# Allegro board netduino_plus2_20Dec16.brd
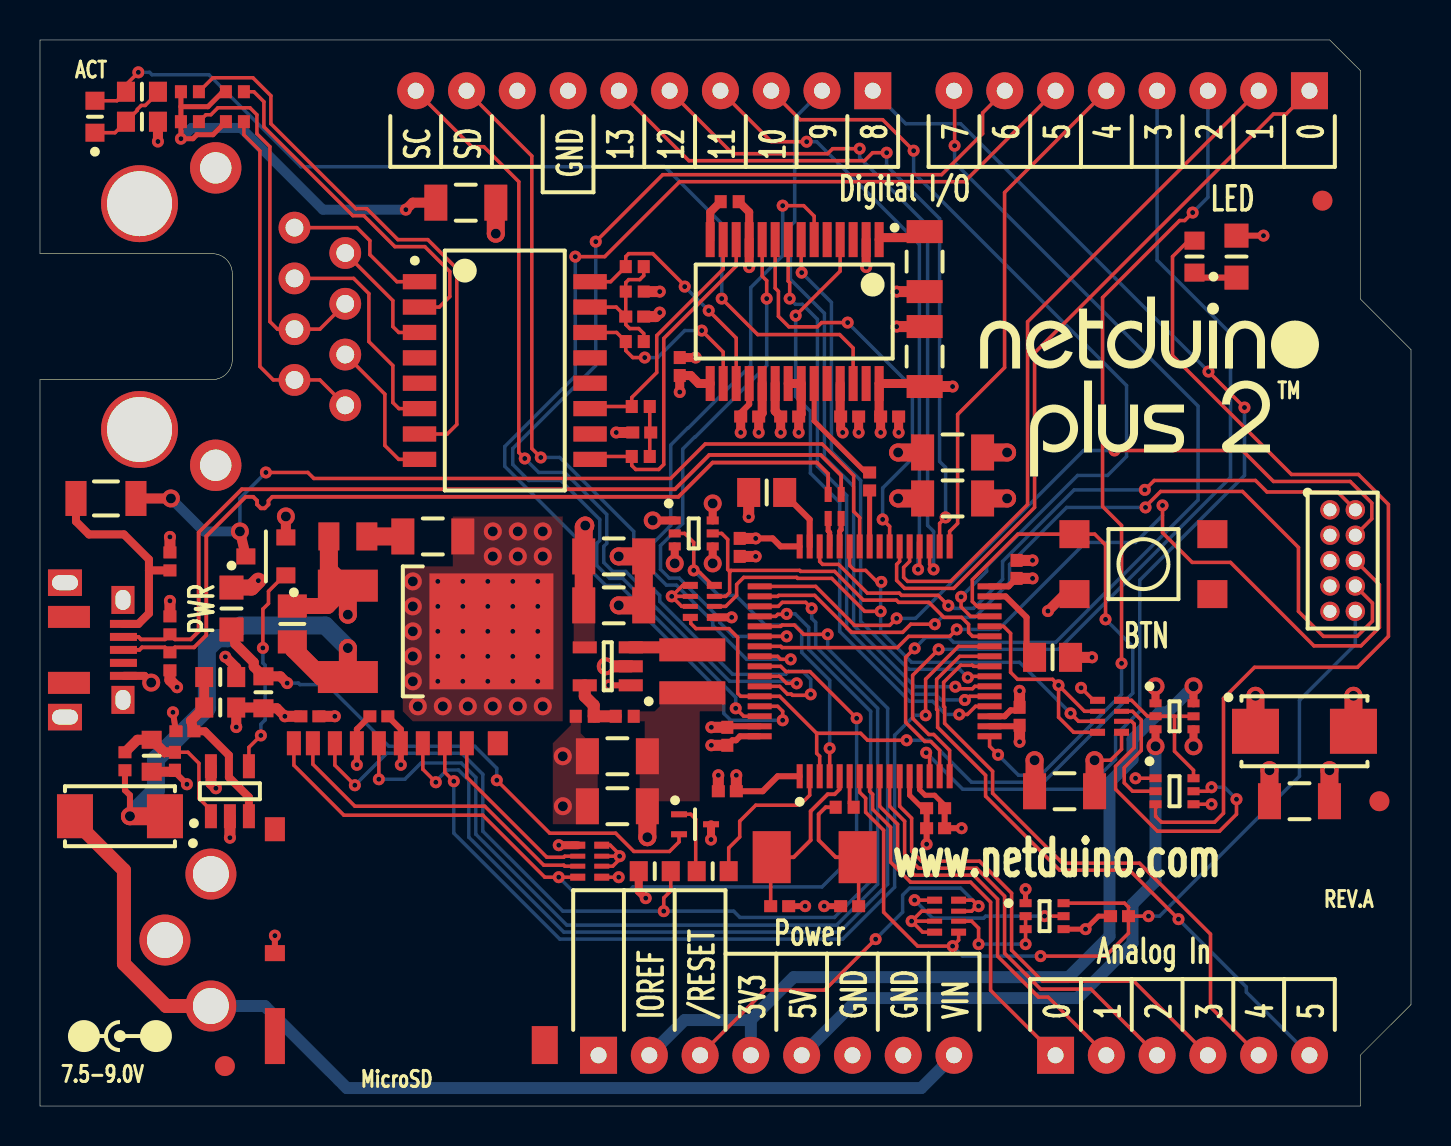
[diagram p0: board, top side]
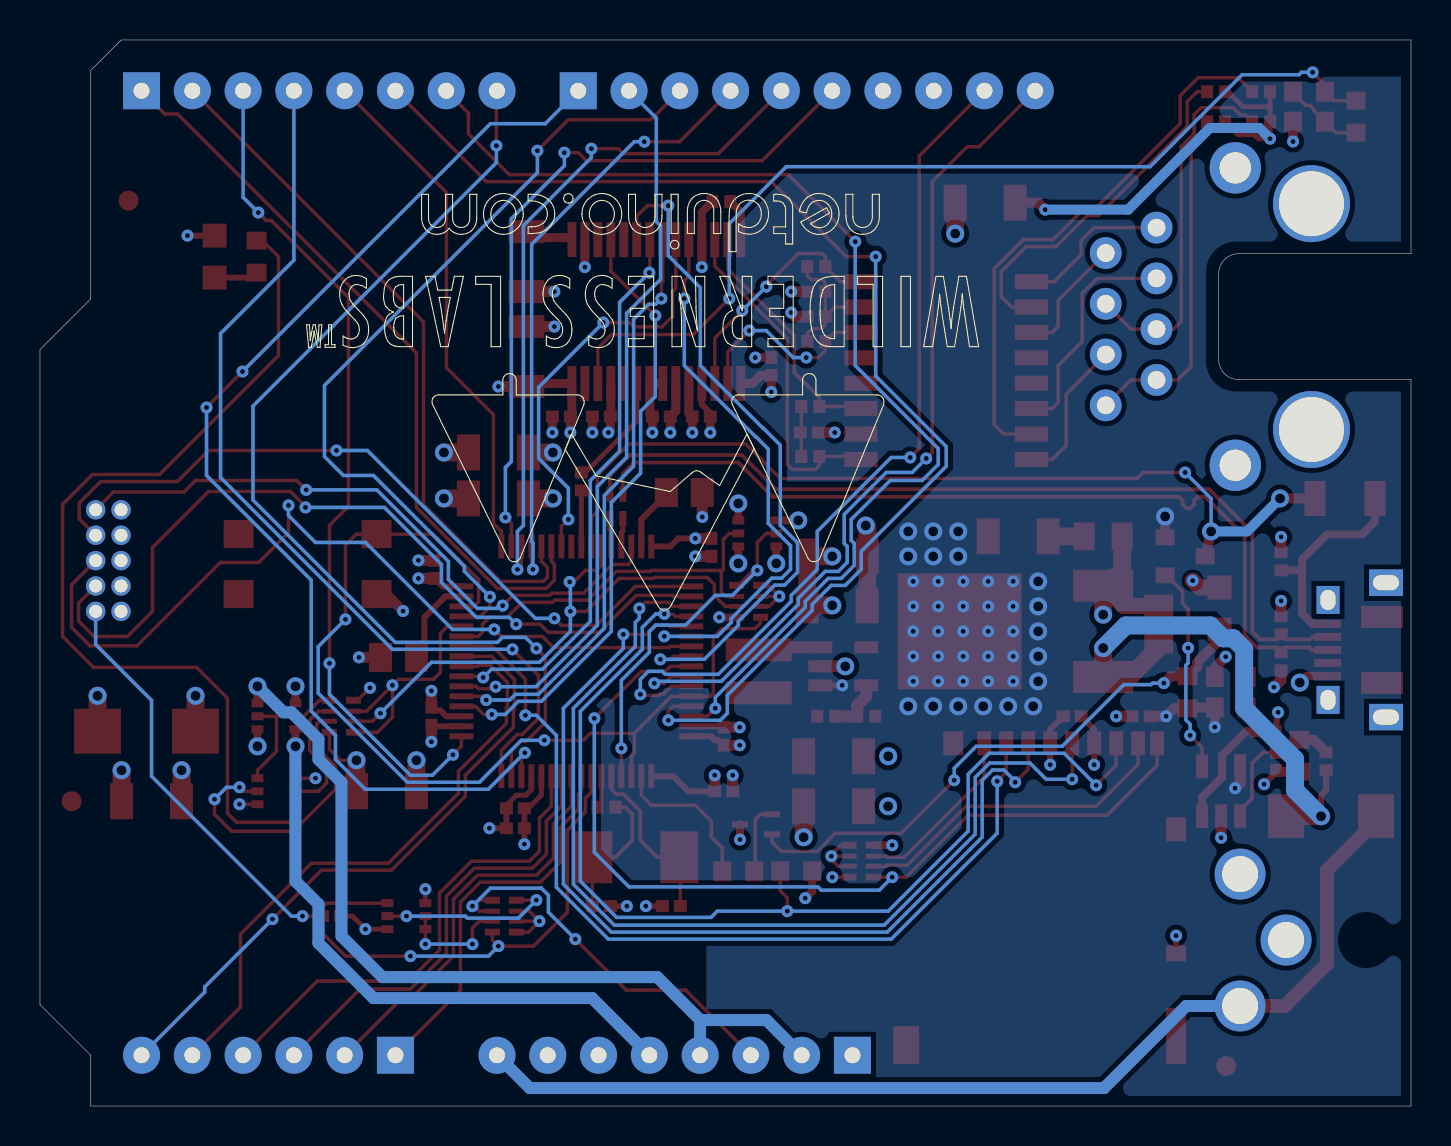
[diagram p1: board, bottom side, seen from below]

Outline 68.58 x 53.34 mm; copper layers: TOP, L2-GND, L3-PWR, BOTTOM. Coordinates in mm from the lower left corner of the outline.
Outline path: 0,53.34 0,42.65 8.62,42.65 arc(9.33,42.35) 9.62,41.65 9.62,37.35 arc(9.33,36.64) 8.62,36.35 0,36.35 0,0 66.04,0 66.04,2.54 68.58,5.08 68.58,37.85 66.04,40.39 66.04,51.82 64.52,53.34 0,53.34

## Placement (name value [footprint] x y rotation side)
C1  0.47uF  [CAPC2012X125N]  12.62 24.12 90 top
C2  10uF  [CAPC3216X180N]  19.65 28.5 180 top
C3  0.1uF  [CAPC1005X55N]  7.25 18.75 180 top
C4  0.1uF  [CAPC1005X55N]  13.5 19.5 0 top
C5  10uF  [CAPC3216X180N]  28.7 25.05 0 top
C6  10uF  [CAPC3216X180N]  28.7 27.5 0 top
C7  10uF  [CAPC3216X180N]  28.88 17.5 180 top
C8  10uF  [CAPC3216X180N]  28.88 15 180 top
C9  0.1uF  [CAPC1005X55N]  6.75 17.25 270 top
C10  0.1uF  [CAPC1005X55N]  34.38 15.75 180 top
C11  0.1uF  [CAPC1005X55N]  49 19.5 270 top
C12  0.1uF  [CAPC1005X55N]  48.85 26.85 90 top
C13  0.1uF  [CAPC1005X55N]  35 27.95 270 top
C14  0.1uF  [CAPC1005X55N]  34.38 18.5 90 top
C15  10uF  [CAPC3216X180N]  51.25 15.75 0 top
C16  10uF  [CAPC3216X180N]  45.65 32.7 0 top
C17  10uF  [CAPC3216X180N]  45.65 30.4 0 top
C18  2.2uF  [CAPC2012X125N]  36.35 30.7 180 top
C19  2.2uF  [CAPC2012X125N]  50.65 22.45 0 top
C20  0.1uF  [CAPC1005X55N]  44.8 14.9 180 top
C21  1uF  [CAPC1005X55N]  44.8 13.9 180 top
C22  0.1uF  [CAPC1005X55N]  54 9.5 180 top
C23  18pF  [CAPC1005X55N]  37 10 0 top
C24  18pF  [CAPC1005X55N]  40.5 10 180 top
C25  100uF  [CAPMP6032X280N]  63.25 18.75 0 top
C26  10uF  [CAPC3216X180N]  63 15.25 0 top
C27  10uF  [CAPC3216X180N]  44.25 37.5 90 top
C28  0.1uF  [CAPC1005X55N]  42.5 34.5 0 top
C29  0.1uF  [CAPC1005X55N]  40.5 34.5 0 top
C30  0.1uF  [CAPC1005X55N]  37.5 34.5 0 top
C31  0.1uF  [CAPC1005X55N]  35.5 34.5 180 top
C32  0.1uF  [CAPC1005X55N]  32 37 90 top
C33  0.1uF  [CAPC1005X55N]  16.95 19.5 180 top
C34  10uF  [CAPC3216X180N]  44.25 42.25 270 top
C35  0.1uF  [CAPC1005X55N]  30.1 33.7 180 top
C36  0.1uF  [CAPC1005X55N]  29.75 39.5 0 top
C37  1nF  [CAPC3216X180N]  21.3 45.2 0 top
D1  -  [SS15-TP]  4 14.5 180 top
D2  WHITE  [LEDC2012X110N]  9.58 24.89 270 top
D3  BLUE  [LEDC2012X110N]  59.85 42.5 90 top
D4  PGB1010402KR  [RESC1005X40AN]  6.5 27.25 90 top
D5  PGB1010402KR  [RESC1005X40AN]  6.5 24.05 90 top
D6  PGB1010402KR  [RESC1005X40AN]  6.5 22.25 270 top
D7  GREEN  [LEDC1608X80N]  2.75 49.5 90 top
F1  1206L050YR  [RESC3216X100N]  3.3 30.4 0 top
J1  HEADER 3  [ADC-043A-1]  8.55 8.31 90 top
J2  HDR100IMP08F-G-V-TH-BLUE  [HDR100IMP08F-G-V-TH]  63.5 50.8 180 top
J3  -  [DX4R005JJ2R1800]  0 22.82 270 top
J4  HDR100IMP08F-G-V-TH-BLUE  [HDR100IMP10F-G-V-TH]  41.66 50.8 180 top
J5  HDR100IMP08F-G-V-TH-BLUE  [HDR100IMP06F-G-V-TH]  50.8 2.54 0 top
J6  HDR100IMP08F-G-V-TH-BLUE  [HDR100IMP08F-G-V-TH]  27.94 2.54 0 top
J7  MINI_JTAG_SMD  [MINI_JTAG_TH]  65.16 27.29 0 top
J8  -  [DM3AT-SF-PEJ]  21.35 17.55 0 top
J9  44661-0002  [44661-0001]  0 39.5 270 top
L1  2.2uH  [LQH3NPN2R2NM0L]  32.63 21.75 270 top
L2  BEAD  [INDC1005X55N]  29.75 40.75 180 top
MT1  -  [MTG320H720NP]  15.24 50.8 0 top
MT2  -  [MTG320H720NP]  66.04 35.56 0 top
MT3  -  [MTG320H720NP]  66.04 7.62 0 top
NOREF  -  [unnamed]  67 15.25 0 top
NOREF#2  -  [unnamed]  64.15 45.3 0 top
NOREF#3  -  [#2]  4 3.5 0 top
NOREF#4  -  [unnamed]  9.25 2 0 top
NOREF#5  -  [#2]  0 53.34 0 top
NOREF#6  -  [#2]  47.02 36.9 0 top
NOREF#7  -  [#2]  0 0 90 top
Q1  MMBT3906TT1G  [SOT50P160X90-3N]  32.77 14.1 0 top
Q2  -  [MBT3904DW1T1G]  50.25 9.5 0 top
Q3  -  [MBT3904DW1T1G]  56.75 15.75 0 top
Q4  -  [NTR4101PT1G]  11.3 27.5 180 top
Q5  -  [NTJD4152PT1G]  56.75 19.5 0 top
Q6  -  [NTJD4152PT1G]  32.7 28.65 0 top
R2  1.5K  [RESC1608]  11.18 20.7 90 top
R3  1K  [RESC2012X70N]  15.4 28.5 0 top
R4  10K  [RESCAV50P80X160X60-8N]  45.35 9.5 0 top
R5  10k  [RESC1608]  33.65 11.75 180 top
R6  1K  [RESC1608]  57.75 42.5 90 top
R7  10K  [RESCAV50P80X160X60-8N]  27.5 12.25 180 top
R8  14K  [RESC1005X40AN]  4.25 17.25 90 top
R9  162K  [RESC1005X40AN]  29.25 19.5 180 top
R10  36K  [RESC1005X40AN]  27.25 19.5 180 top
R11  10K  [RESCAV50P80X160X60-8N]  53.5 19.5 0 top
R12  10K  [RESCAV50P80X160X60-8N]  33.13 25.25 0 top
R13  390  [RESC1005X40AN]  40.25 14.95 0 top
R14  22  [EXB24V]  39.75 30 270 top
R15  10k  [RESC1608]  5.1 50.75 0 top
R16  1.5K  [RESC1608]  5.1 49.25 0 top
R17  2.32k  [RESC1005X40AN]  34.5 45.25 0 top
R18  49.9  [RESC1005X40AN]  30.05 35 0 top
R19  49.9  [RESC1005X40AN]  30.05 32.5 0 top
R20  49.9  [RESC1005X40AN]  29.75 42 0 top
R21  49.9  [RESC1005X40AN]  29.75 38.25 0 top
R22  75  [RESC1005X40AN]  7.5 50.75 180 top
R23  75  [RESC1005X40AN]  9.75 50.75 180 top
R24  75  [RESC1005X40AN]  7.5 49.25 180 top
R25  75  [RESC1005X40AN]  9.75 49.25 180 top
R26  10k  [RESC1608]  30.75 11.75 180 top
R27  10k  [RESC1608]  9.02 21.46 0 top
R28  10k  [RESC1608]  5.59 17.53 270 top
R30  33  [RESC1005X40AN]  41.5 31.25 270 top
R31  10k  [RESC1608]  9.02 19.94 180 top
SW1  -  [TSXH-2GL]  55.2 27.11 180 top
T1  -  [HX1198NL]  23.25 36.8 0 top
U1  MC33269DT-5.0G  [MC33269DT]  15.4 23.75 0 top
U2  -  [ST1S12GR]  28.4 22 180 top
U3  LMV7271MF/NOPB  [SOT95P280X145-5N]  9.5 15.75 90 top
U4  STM32F205RFT6  [STM32F405RGT6]  41.75 22.25 90 top
U5  ENC28J60T-I/SS  [SOP65P780X200-28N]  38.4 39.75 270 top
Y1  25000Mhz  [ABM7]  38.75 12.45 180 top

## Library data of the parts
C1-C37 = C
D1 = D05AZ75_2
D2 D7 = LED_2
D3 = LED_1
D4-D6 = D05AZ75_1
F1 = FUSE
J1 = HEADER 3
J2 J6 = HEADER 8
J3 = HEADER 11_0
J4 = HEADER 10
J5 = HEADER 6
J7 = HEADER 10_2
J8 = HEADER 10_4
J9 = CONN_FPC10P_0
L1 = L
L2 = BEAD FERRITE/SM
MT1-MT3 = MOUNT_HOLE
Q1 = 2N1132_0
Q2 Q3 = MUN5215DW1T1G_6
Q4 = NDF0610/TO_1
Q5 Q6 = NTJD4152PT1G
R2 R3 R5 R6 R8-R10 R13 R15-R28 R30 R31 = R
R4 R7 R11 R12 = RESCAV50P80X160X60-8N
R14 = EXB24V
SW1 = SW PUSHBUTTON-SPST-2_0
T1 = HX1198NLT_0
U1 = LM7805/TO_2
U2 = HEADER 5_2
U3 = LMV321/SO
U4 = STM32F427_2
U5 = ENC28J60T-I/SS
Y1 = CRYSTAL_2

## Footprints (pads in the part's own frame, mm; a bottom-side part is the same pattern mirrored in y, then rotated)
44661-0001
  round 1.59 hole 0.89: 1(-4.45,12.73) 2(-3.18,15.27) 3(-1.91,12.73) 4(-0.64,15.27) 5(0.63,12.73) 6(1.9,15.27) 7(3.17,12.73) 8(4.44,15.27)
  round 2.57 hole 1.57: 9(-7.44,8.79) 10(7.44,8.79)
  round 3.85 hole 3.25: 11(-5.65,4.98) 12(5.65,4.98)
ABM7
  rect 1.9x2.6 smd: 1(-2.15,0) 2(2.15,0)
ADC-043A-1
  round 0 hole 2.4 unplated: (0,6.3)
  round 2.55 hole 1.8: 1(-3.3,0) 2(0,2.3) 3(3.3,0)
CAPC1005X55N
  rect 0.65x0.6 smd: 1(-0.45,0) 2(0.45,0)
CAPC2012X125N
  rect 1.15x1.45 smd: 1(-0.9,0) 2(0.9,0)
CAPC3216X180N
  rect 1.15x1.8 smd: 1(-1.5,0) 2(1.5,0)
CAPMP6032X280N
  rect 2.35x2.25 smd: 1(-2.45,0) 2(2.45,0)
DM3AT-SF-PEJ
  rect 0.7x1.2 smd: 1(0,0.6) 2(-1.1,0.6) 3(-2.2,0.6) 4(-3.3,0.6) 5(-4.4,0.6) 6(-5.5,0.6) 7(-6.6,0.6) 8(-7.7,0.6) 9(-8.65,0.6)
  rect 1x0.8 smd: 10(-9.6,-9.9)
  rect 1x1.2 smd: 11(-9.6,-3.7) 14(1.55,0.6)
  rect 1x2.8 smd: 12(-9.6,-14.05)
  rect 1.3x1.9 smd: 13(3.9,-14.5)
DX4R005JJ2R1800
  rect 0.4x1.35 smd: 1(-1.3,4.175) 2(-0.65,4.175) 3(0,4.175) 4(0.65,4.175) 5(1.3,4.175)
  rect 1.4x1.15 hole 1x0.75: 6(-2.5,4.15) 7(2.5,4.15)
  rect 1.325x1.7 hole 0.75x1.3: 8(-3.362,1.25) 11(3.362,1.25)
  rect 1.1x2.1 smd: 9(-1.65,1.45) 10(1.65,1.45)
EXB24V
  rect 0.75x0.35 smd: 1(-0.6,0.325) 2(-0.6,-0.325) 3(0.6,-0.325) 4(0.6,0.325)
HDR100IMP06F-G-V-TH
  rect 1.85x1.85 hole 0.8: 1(0,0)
  round 1.85 hole 0.8: 2(2.54,0) 3(5.08,0) 4(7.62,0) 5(10.16,0) 6(12.7,0)
HDR100IMP08F-G-V-TH
  rect 1.85x1.85 hole 0.8: 1(0,0)
  round 1.85 hole 0.8: 2(2.54,0) 3(5.08,0) 4(7.62,0) 5(10.16,0) 6(12.7,0) 7(15.24,0) 8(17.78,0)
HDR100IMP10F-G-V-TH
  rect 1.85x1.85 hole 0.8: 1(0,0)
  round 1.85 hole 0.8: 2(2.54,0) 3(5.08,0) 4(7.62,0) 5(10.16,0) 6(12.7,0) 7(15.24,0) 8(17.78,0) 9(20.32,0) 10(22.86,0)
HX1198NL
  rect 1.67x0.76 smd: 1(-4.265,4.445) 2(-4.265,3.175) 3(-4.265,1.905) 4(-4.265,0.635) 5(-4.265,-0.635) 6(-4.265,-1.905) 7(-4.265,-3.175) 8(-4.265,-4.445) 9(4.265,-4.445) 10(4.265,-3.175) 11(4.265,-1.905) 12(4.265,-0.635) 13(4.265,0.635) 14(4.265,1.905) 15(4.265,3.175) 16(4.265,4.445)
INDC1005X55N
  rect 0.6x0.6 smd: 1(-0.45,0) 2(0.45,0)
LEDC1608X80N
  rect 0.899x0.95 smd: A(0.8,0) C(-0.8,0)
LEDC2012X110N
  rect 1.2x1.2 smd: A(1.05,0) C(-1.05,0)
LQH3NPN2R2NM0L
  rect 1.15x3.3 smd: 1(-1.075,0) 2(1.075,0)
MBT3904DW1T1G
  rect 0.6x0.4 smd: 1(-0.95,0.65) 2(-0.95,0) 3(-0.95,-0.65) 4(0.95,-0.65) 5(0.95,0) 6(0.95,0.65)
MC33269DT
  rect 3x1.6 smd: 1(0,2.286) 3(0,-2.286)
  rect 6.2x5.8 smd: 4(7.18,0)
MINI_JTAG_TH
  round 0.97 hole 0.65: 1(-0.635,2.54) 2(0.635,2.54) 3(-0.635,1.27) 4(0.635,1.27) 5(-0.635,0) 6(0.635,0) 7(-0.635,-1.27) 8(0.635,-1.27) 9(-0.635,-2.54) 10(0.635,-2.54)
MTG320H720NP
  round 0 hole 3.2 unplated: (0,0)
NTJD4152PT1G
  rect 0.6x0.4 smd: 1(-0.95,0.65) 2(-0.95,0) 3(-0.95,-0.65) 4(0.95,-0.65) 5(0.95,0) 6(0.95,0.65)
NTR4101PT1G
  rect 0.95x0.8 smd: 1(-1,0.95) 2(-1,-0.95) 3(1,0)
RESC1005X40AN
  rect 0.6x0.65 smd: 1(-0.45,0) 2(0.45,0)
RESC1608
  rect 0.899x1.001 smd: 1(-0.8,0) 2(0.8,0)
RESC2012X70N
  rect 1.05x1.4 smd: 1(-0.95,0) 2(0.95,0)
RESC3216X100N
  rect 1.05x1.75 smd: 1(-1.5,0) 2(1.5,0)
RESCAV50P80X160X60-8N
  rect 0.75x0.35 smd: 1(-0.6,0.8) 4(-0.6,-0.8) 5(0.6,-0.8) 8(0.6,0.8)
  rect 0.75x0.25 smd: 2(-0.6,0.25) 3(-0.6,-0.25) 6(0.6,-0.25) 7(0.6,0.25)
SOP65P780X200-28N
  rect 1.75x0.45 smd: 1(-3.6,3.575) 2(-3.6,2.925) 3(-3.6,2.275) 4(-3.6,1.625) 5(-3.6,0.975) 6(-3.6,0.325) 7(-3.6,-0.325) 8(-3.6,-0.975) 9(-3.6,-1.625) 10(-3.6,-2.275) 11(-3.6,-2.925) 12(-3.6,-3.575) 13(-3.6,-4.225) 14(-3.6,-4.875) 15(3.6,-4.875) 16(3.6,-4.225) 17(3.6,-3.575) 18(3.6,-2.925) 19(3.6,-2.275) 20(3.6,-1.625) 21(3.6,-0.975) 22(3.6,-0.325) 23(3.6,0.325) 24(3.6,0.975) 25(3.6,1.625) 26(3.6,2.275) 27(3.6,2.925) 28(3.6,3.575)
SOT50P160X90-3N
  rect 0.8x0.3 smd: 1(-0.8,0.5) 2(-0.8,-0.5) 3(0.8,0)
SOT95P280X145-5N
  rect 1.2x0.6 smd: 1(-1.25,0.95) 2(-1.25,0) 3(-1.25,-0.95) 4(1.25,-0.95) 5(1.25,0.95)
SS15-TP
  rect 1.8x2.2 smd: A(2.25,0) C(-2.25,0)
ST1S12GR
  rect 1.2x0.6 smd: 1(-1.15,0.95) 2(-1.15,0) 3(-1.15,-0.95) 4(1.15,-0.95) 5(1.15,0.95)
STM32F405RGT6
  rect 1.2x0.3 smd: 1(-5.75,3.75) 2(-5.75,3.25) 3(-5.75,2.75) 4(-5.75,2.25) 5(-5.75,1.75) 6(-5.75,1.25) 7(-5.75,0.75) 8(-5.75,0.25) 9(-5.75,-0.25) 10(-5.75,-0.75) 11(-5.75,-1.25) 12(-5.75,-1.75) 13(-5.75,-2.25) 14(-5.75,-2.75) 15(-5.75,-3.25) 16(-5.75,-3.75) 33(5.75,-3.75) 34(5.75,-3.25) 35(5.75,-2.75) 36(5.75,-2.25) 37(5.75,-1.75) 38(5.75,-1.25) 39(5.75,-0.75) 40(5.75,-0.25) 41(5.75,0.25) 42(5.75,0.75) 43(5.75,1.25) 44(5.75,1.75) 45(5.75,2.25) 46(5.75,2.75) 47(5.75,3.25) 48(5.75,3.75)
  rect 0.3x1.2 smd: 17(-3.75,-5.75) 18(-3.25,-5.75) 19(-2.75,-5.75) 20(-2.25,-5.75) 21(-1.75,-5.75) 22(-1.25,-5.75) 23(-0.75,-5.75) 24(-0.25,-5.75) 25(0.25,-5.75) 26(0.75,-5.75) 27(1.25,-5.75) 28(1.75,-5.75) 29(2.25,-5.75) 30(2.75,-5.75) 31(3.25,-5.75) 32(3.75,-5.75) 49(3.75,5.75) 50(3.25,5.75) 51(2.75,5.75) 52(2.25,5.75) 53(1.75,5.75) 54(1.25,5.75) 55(0.75,5.75) 56(0.25,5.75) 57(-0.25,5.75) 58(-0.75,5.75) 59(-1.25,5.75) 60(-1.75,5.75) 61(-2.25,5.75) 62(-2.75,5.75) 63(-3.25,5.75) 64(-3.75,5.75)
TSXH-2GL
  rect 1.5x1.4 smd: 1(-3.45,1.5) 2(3.45,1.5) 3(-3.45,-1.5) 4(3.45,-1.5)
unnamed
  round 1 smd: (0,0)

## Nets
+3.3V: C7.1 C8.1 C10.1 C11.1 C12.1 C13.1 C14.1 C15.1 C16.1 C17.1 C20.1 C21.1 C25.1 C26.1 J7.1(VCC) L1.2 Q5.1(SOURCE) Q6.1(SOURCE) Q6.4(SOURCE) R4.2(1) R4.3(1) R4.4(1) R7.1 R9.1 R12.1 R12.2(1) R12.3(1) SW1.2 U4.1(VBAT) U4.13(VDDA) U4.19(VDD1) U4.32(VDD2) U4.48(VDD3) U4.64(VDD4)
+3V3_ETHERNET: C27.1 C28.1 C29.1 C30.1 C31.1 C32.1 L2.1 Q6.6(DRAIN) U5.15(VDDTX) U5.19(VDDRX) U5.20(VDDPLL) U5.25(VDDOSC) U5.28(VDD)
+3V3_HEADER: J6.2 J6.4 Q5.6(DRAIN)
+3V3_MICROSD: C33.1 J8.4(VDD) Q6.3(DRAIN) R7.2(1) R7.3(1) R7.4(1)
+5.0V: C2.1 C4.1 C5.1 C6.1 D3.A(ANODE) Q4.2(SOURCE) Q5.4(SOURCE) R2.1 R11.1 R31.1 U1.4(VOUT) U2.1(EN) U2.4(VIN) U3.5(+VCC)
+5V_HEADER: J6.5 Q5.3(DRAIN)
+VIN: D1.A(1) J1.1 J6.8
+VIN_PROTECTED: C1.1 D1.C(2) R8.1 U1.3(VIN)
GND: C1.2 C3.2 C4.2 C5.2 C6.2 C7.2 C8.2 C9.2 C10.2 C11.2 C12.2 C13.2 C14.2 C15.2 C16.2 C17.2 C18.2 C19.2 C20.2 C21.2 C22.2 C23.2 C24.2 C25.2 C26.2 C27.2 C28.2 C29.2 C30.2 C31.2 C32.2 C33.2 C34.2 C35.2 C36.2 C37.2 D2.C(CATHODE) D4.2 D5.2 D6.2 J1.2 J1.3 J3.5(GND) J4.7 J6.6 J6.7 J7.3(GND1) J7.5(GND2) J7.7(GND3) J7.9(GND4) J8.6(VSS) J8.10(SW_GND) J9.9 J9.10 J9.11 J9.12 Q1.3(COLLECTOR) Q2.1(E) Q2.4(E) Q3.1(E) Q3.4(E) R3.1 R7.5(2) R10.2 R11.5(2) R12.5(2) R16.2 R17.2 R26.2 R27.2 R28.2 U1.1(GND) U2.2(GND) U3.2(-VCC) U4.12(VSSA) U4.18(VSS1) U4.63(VSS2) U5.2(VSS) U5.11(VSSRX) U5.18(VSSTX) U5.21(VSSPLL) U5.22(VSSOSC)
VIN_COMP: C9.1 R8.2 R28.1 U3.1(+VIN)
VIN_COMP_LOGIC: Q4.1(GATE) U3.4(OUT)
VIN_REF: C3.1 R27.1 R31.2 U3.3(-VIN)
/ENC_CS: U4.39(PC8/TIM3_CH3) U5.9(/CS)
/ENC_INT: U4.20(PA4) U5.4(/INT)
/ENC_RESET: U4.54(PD2/UART5_RX) U5.10(/RESET)
/EXTERNAL_RESET: J6.3 R4.7(2) R4.8(2)
/MICRO_SD_CARD_INSERTED: J8.9(C\A\R\D\_\I\N\_\S\W\) R7.8(2) U4.57(PB5/CAN2_RX/SPI3_MOSI)
/MICROSD_CS: J8.2(C\S\) U4.26(PB0)
/PWR_CTRL_ETHERNET: Q6.2(GATE) R12.8(2) U4.4(PC15)
/PWR_CTRL_HEADERS: Q3.6(C) Q5.2(GATE) Q5.5(GATE) R11.8(2)
/PWR_CTRL_MICROSD: Q6.5(GATE) R12.7(2) U4.27(PB1)
/PWR_LED_OFF: R5.1 U4.2(PC13)
/RESET_MCU: C22.1 J7.10(NRST) Q2.6(C) R4.5(2) U4.7(\\R\S\T)
A0: J5.1 U4.8(PC0)
A1: J5.2 U4.9(PC1)
A2: J5.3 U4.10(PC2)
A3: J5.4 U4.11(PC3)
A4: J5.5 U4.24(PC4)
A5: J5.6 U4.25(PC5)
CLOCK_OUT_25MHZ: R30.2 U4.41(PA8)
CLOCK_SIGNAL_25MHZ: R30.1 U5.23(OSC1)
CT_T: C36.1 L2.2 R20.2 R21.2 T1.15(CT_T)
CTRL_OF_PWR_HEADERS: R11.2(1) R11.4(1) U4.28(PB2/BOOT1)
D0: J2.1 U4.38(PC7/TIM3_CH2)
D1: J2.2 U4.37(PC6/TIM3_CH1)
D2: J2.3 U4.17(PA3/USART2_RX)
D3: J2.4 U4.16(PA2/USART2_TX)
D4: J2.5 U4.33(PB12)
D5: J2.6 U4.61(PB8/TIM4_CH3)
D6: J2.7 U4.62(PB9/TIM4_CH4)
D7: J2.8 U4.15(PA1/USART4_RX)
D8: J4.1 U4.14(PA0/USART4_TX)
D9: J4.2 U4.22(PA6/SPI1_MISO)
D10: J4.3 U4.29(PB10/USART3_TX)
D11: J4.4 U4.36(PB15/SPI2_MOSI)
D12: J4.5 U4.35(PB14/SPI2_MISO)
D13: J4.6 U4.34(PB13/SPI2_SCK)
DCDC_FB: R9.2 R10.1 U2.5(FB)
ENC_MISO: U4.56(PB4/J\T\R\S\T\) U5.6(SO)
ENC_MOSI: U4.23(PA7/SPI1_MOSI) U5.7(SI)
ENC_SCK: U4.21(PA5/SPI1_SCK) U5.8(SCK)
JTCK: J7.4(JTCK) U4.49(PA14/JTCK-SWCLK)
JTDI: J7.8(JTDI) U4.50(PA15/JTDI)
JTDO: J7.6(JTDO) U4.55(PB3/JTDO/TRACESW0)
JTMS: J7.2(JTMS) U4.46(PA13/JTMS-SWDIO)
LED: R11.3(1) R12.6(2) U4.43(PA10/OTG_FS_ID)
LEDB: D7.A(ANODE) R15.1 U5.26(LEDB)
OSC_IN: C23.1 U4.5(PH0/OSC_IN) Y1.2
OSC_OUT: R13.2 U4.6(PH1/OSC_OUT)
OTG_FS_DM: R14.4(2) U4.44(PA11/OTG_FS_DM)
OTG_FS_DP: R14.3(2) U4.45(PA12/OTG_FS_DP)
RBIAS: R17.1 U5.14(RBIAS)
RD+: R18.1 T1.11(RD+) U5.13(TPIN+)
RD-: R19.1 T1.9(RD-) U5.12(TPIN-)
RX+: J9.3(RX+) T1.6(RX+)
RX-: J9.6(RX-) T1.8(RX-)
SCL: J4.10 U4.58(PB5/CAN2_TX/TIM4_CH1)
SDA: J4.9 U4.59(PB7/TIM4_CH2)
SPI3_MISO: J8.7(DO) R26.1 U4.52(PC11/USART3_RX)
SPI3_MOSI: J8.3(DI) U4.53(PC12/UART5_TX)
SPI3_SCK: J8.5(CLK) U4.51(PC10/SPI3_SCK)
SWITCH1: R12.4(1) SW1.4 U4.3(PC14) U4.30(PB11/USART3_RX) U4.60(BOOT0)
TD+: R20.1 T1.16(TD+) U5.17(TPOUT+)
TD-: R21.1 T1.14(TD-) U5.16(TPOUT-)
TX+: J9.1(TX+) T1.1(TX+)
TX-: J9.2(TX-) T1.3(TX-)
USB5V: D4.1 F1.1 J3.1(VBUS)
USB5V_F: F1.2 Q4.3(DRAIN) U4.42(PA9/OTG_FS_VBUS)
USB_D+: D6.1 J3.3(D+) R14.2(1)
USB_D-: D5.1 J3.2(D-) R14.1
VCAP_1: C19.1 U4.31(VCAP_1)
VCAP_2: C18.1 U4.47(VCAP_2)
N62753: Q2.2(B) Q2.3(C) R4.6(2)
N62801: D3.C(CATHODE) R6.1
N63121: C24.1 R13.1 Y1.1
N63233: C2.2 R3.2
N74908: Q3.3(C) R6.2
N236614: D2.A(ANODE) Q1.2(EMITTER) R2.2
N237577: Q1.1(BASE) R5.2
N238352: Q3.5(B) R11.6(2)
N238638: Q2.5(B) R4.1
N251644: Q3.2(B) R11.7(2)
N353564: J8.1(NC) R7.6(2)
N353572: J8.8(RSV) R7.7(2)
N356854: C34.1 U5.1(VCAP)
N357540: C35.1 R18.2 R19.2
N357870: R23.1 T1.2(CX_T)
N357878: R22.1 T1.7(RX_T)
N357886: J9.4 J9.5 R24.1
N357906: J9.7 J9.8 R25.1
N357926: C37.1 R22.2 R23.2 R24.2 R25.2
N358056: D7.C(CATHODE) R15.2 R16.1
N1930270: L1.1 U2.3(SW)

Pads without a net: J3 4 6 7 8 9 10 11; J4 8; J6 1; J8 11 12 13 14; SW1 1 3; T1 4 5 10 12 13; U4 40; U5 3 5 24 27

## Via types
v1: diameter 0.6, hole 0.25, TOP to BOTTOM, 181 vias
v2: diameter 0.9, hole 0.5, TOP to BOTTOM, 50 vias

## Routing (per net, layer and track width the routed paths; a pad name or vN(x,y) marks a point on that pad's centre or on a via; arc(x,y) is an arc through that point)
+3.3V: length 40.4
  TOP w0.175: v1(31.6,25.5) 32.1,25 R12.3 ; v1(31.6,25.5) R12.2 ; v1(31.6,25.5) 32.15,26.05 R12.1 ; R4.2 44.1,9.75 v1(43.6,9.25) ; v1(43.6,9.25) 44.15,8.7 R4.4 ; v1(43.6,9.25) R4.3 ; R7.1 v1(28.95,11.45)
  TOP w0.25: C20.1 45.25,15.05 44.75,15.55 44.28,15.55 44,15.83 U4.13
  TOP w0.3: U4.48 37.05,28 36.65,28.4 v1(35.8,28.4) ; v1(46.1,13.9) C21.1 C20.1 ; C14.1 34.63,18.3 34.82,18.3 35.02,18.5 U4.64 ; U4.19 48.25,19.5 48.55,19.8 48.85,19.8 C11.1 ; U4.32 48.45,26 C12.1 ; C10.1 36.15,15.75 36.9,16.5 U4.1
  TOP w0.4: Q6.4 v2(33.65,27.15) ; Q6.1 v2(30.65,29.3) ; Q5.1 v2(55.8,21)
  TOP w0.5: SW1.2 51.27,25.61 v1(50.42,24.77)
  TOP w0.55: C10.1 v1(34.83,16.55) ; C11.1 v1(49,20.77) ; C14.1 v1(33.58,18.05) ; C13.1 v1(35.8,28.4) ; C12.1 v1(49.65,26.4)
  TOP w0.9: C26.1 v2(61.5,16.8) ; C16.1 v2(42.92,32.7) ; C8.1 v2(30.38,13.45) ; C25.1 v2(60.8,20.52) ; C17.1 v2(42.92,30.4) ; C15.1 v2(49.75,17.3)
+3V3_ETHERNET: length 18
  TOP w0.4: Q6.6 v2(33.65,30.15)
  TOP w0.45: U5.25 40.02,34.52 C29.1 40.05,33.85 40.15,33.75 v1(40.15,33.7) ; C27.1 44.1,36.15 U5.28 41.98,34.58 C28.1 v1(42.05,33.7) ; U5.15 32.95,36.15 32.55,36.55 C32.1 v1(32,35.73) ; U5.19 36.12,34.67 C31.1 v1(35.95,33.7) ; v1(37.05,33.7) C30.1 36.77,34.77 U5.20
  TOP w0.55: L2.1 v1(31,40.75) ; C27.1 v1(45.65,36)
+3V3_HEADER: length 42.6
  TOP w0.4: Q5.6 v2(57.7,21)
  BOTTOM w0.6: v2(57.7,21) 56.4,19.7 56,19.7 54.65,18.35 54.65,17.35 53.5,16.2 53.5,8.5 51.45,6.45 37.7,6.45 35.56,4.31 35.56,4.3 ; 35.56,4.3 32.24,4.3 J6.2 ; 35.56,4.3 J6.4
+3V3_MICROSD: length 6.8
  TOP w0.175: R7.4 28.52,13.05 28.99,12.58 v1(28.99,12.5) ; R7.2 28.65,12 28.99,12.34 v1(28.99,12.5) ; R7.3 v1(28.99,12.5)
  TOP w0.3: C33.1 18.05,18.85 J8.4 v1(18.05,17.07)
  TOP w0.4: Q6.3 v2(31.75,27.15)
+5.0V: length 15.1
  TOP w0.175: v1(52.08,20.93) 52.7,20.3 R11.1
  TOP w0.3: U2.1 v1(28.45,21.05) ; D3.A v1(61.2,43.55)
  TOP w0.4: Q5.4 v2(57.7,18)
  TOP w0.5: v1(12.25,19.5) 11.85,19.9 R2.1 11.14,19.94 R31.1 v1(9.82,18.96) ; Q4.2 v2(12.3,29.5)
  TOP w0.55: U3.5 8.55,16.15 v1(8.8,15.9) ; C4.1 v1(12.25,19.5)
  TOP w0.9: v2(27.27,29.04) 27.2,28.97 C6.1 C5.1
  vias: v1(19.9,26.25) v1(19.9,25) v1(19.9,23.75) v1(19.9,22.5) v1(19.9,21.25) v1(21.15,26.25) v1(21.15,25) v1(21.15,23.75) v1(21.15,22.5) v1(21.15,21.25) v1(22.4,26.25) v1(22.4,25) v1(22.4,23.75) v1(22.4,22.5) v1(22.4,21.25) v1(23.65,26.25) v1(23.65,25) v1(23.65,23.75) v1(23.65,22.5) v1(23.65,21.25) v1(24.9,26.25) v1(24.9,25) v1(24.9,23.75) v1(24.9,22.5) v1(24.9,21.25) v2(18.65,26.25) v2(18.65,25) v2(18.65,23.75) v2(18.65,22.5) v2(18.65,21.25) v2(18.9,20) v2(20.15,20) v2(21.4,20) v2(22.65,28.75) v2(22.65,27.5) v2(22.65,20) v2(23.9,28.75) v2(23.9,27.5) v2(23.9,20) v2(25.15,28.75) v2(25.15,27.5) v2(25.15,20)
+5V_HEADER: length 30.1
  TOP w0.4: Q5.3 v2(55.8,18)
  BOTTOM w0.6: J6.5 40.96,5.4 51.9,5.4 54.65,8.15 54.65,10.1 55.8,11.25 v2(55.8,18)
+VIN: length 53.2
  TOP w0.7: D1.A 1.75,14.25 4.2,11.8 4.2,7.12 6.31,5.01 J1.1
  BOTTOM w0.6: J6.8 44.08,0.9 15.35,0.9 11.24,5.01 J1.1
+VIN_PROTECTED: length 27.2
  TOP w0.3: R8.1 4.25,15.8 4.5,15.55 v2(4.5,14.5)
  TOP w0.9: D1.C v2(4.5,14.5) ; C1.1 12.7,22.85 14.09,21.46 U1.3 v2(15.4,22.91)
  BOTTOM w0.9: v2(4.5,14.5) 5.8,15.8 5.8,17.36 8.35,19.9 8.35,22.86 8.89,23.4 9.39,23.4 10.03,24.04 14.27,24.04 v2(15.4,22.91)
GND: length 83.3
  TOP w0.175: Q3.1 v1(54.8,16.4) ; v2(52.75,17.3) 53.55,17.3 54.1,17.85 R11.5 ; Q3.4 v1(58.6,15.1)
  TOP w0.25: U4.12 43.5,15.55 44.15,14.9 C20.2 ; Q2.4 v1(52.3,8.85) 52.95,9.5 C22.2 ; Q2.1 v1(49.3,10.85)
  TOP w0.3: v1(15.85,17.07) J8.6 15.85,18.85 C33.2 ; C3.2 v1(6.65,19.7) ; v1(7.35,16.1) 6.75,16.7 C9.2 ; C31.2 35.05,34.68 35.48,35.11 U5.18 ; U4.18 48.95,19 C11.2 ; C14.2 34.43,19 U4.63 ; J8.10 v1(11.75,8.53) ; v1(44.35,13.1) C21.2 C20.2 ; C23.2 v1(38.27,10) ; C24.2 v1(39.23,10)
  TOP w0.4: R26.2 29.95,10.75 v1(30.3,10.4) ; R12.5 v1(34.6,24.45) ; R17.2 35.48,44.73 U5.11 ; Q1.3 v1(33.57,13.33) ; R7.5 v1(25.95,13.05) ; v2(5.56,21.19) 5.23,21.52 J3.5
  TOP w0.45: v1(37.95,33.7) C30.2 38.08,34.62 38.08,36.15 U5.21 ; U5.2 v1(41.33,41.98) ; C32.2 v1(32.8,37.45) ; C28.2 v1(42.95,33.7) ; C29.2 v1(40.95,33.7) ; C31.2 v1(35.05,33.7) ; U5.11 v1(35.48,41.98)
  TOP w0.5: R27.2 9.82,21.93 v1(9.27,22.48) ; R28.2 6.68,16.73 C9.2 ; R16.2 v1(5.9,48.26)
  TOP w0.55: D4.2 v1(6.5,28.48) ; C10.2 v1(33.93,16.55) ; C19.2 v1(52.62,22.45) ; C14.2 v1(33.58,18.95) ; C35.2 v1(28.82,33.7) ; C27.2 v1(42.85,39) ; C4.2 v1(14.75,19.5) ; C34.2 v1(42.85,40.75) ; D6.2 6.5,21.31 v1(6.86,20.95) ; C13.2 v1(35.8,27.5) ; U3.2 v1(9.5,13.43) ; C12.2 v1(49.65,27.3) ; v1(31,39.7) 30.8,39.5 C36.2 ; D5.2 v1(6.5,25.27) ; C11.2 v1(49,18.23) ; C18.2 v1(35.45,29.48)
  TOP w0.6: U2.2 v2(28.3,22)
  TOP w0.8: D2.C 10.57,25.94 v1(10.92,26.29) ; U1.1 14.38,25.02 C1.2
  TOP w0.9: C26.2 v2(64.5,16.8) ; C25.2 v2(65.7,20.52) ; C17.2 v2(48.38,30.4) ; v2(28.95,25.05) C5.2 C6.2 v2(28.95,27.5) ; R3.1 14.45,26.8 15.21,26.04 U1.1 v2(15.4,24.59) ; C15.2 v2(52.75,17.3) ; C16.2 v2(48.38,32.7) ; C37.2 v2(22.8,43.65)
  vias: v2(26.15,17.5) v2(26.16,15)
VIN_COMP: length 7.3
  TOP w0.175: U3.1 8.55,14.8 7.95,15.4 7.95,17.15 7.4,17.7 C9.1
  TOP w0.5: C9.1 6.21,17.7 R28.1 4.88,18.33 R8.2
VIN_COMP_LOGIC: length 10.5
  TOP w0.175: v1(11.05,18.54) 10.45,17.94 U3.4 ; Q4.1 12.22,26.55 11.43,25.75 11.43,25.15 11.15,24.87 v1(11.15,22.92)
  BOTTOM w0.175: v1(11.15,22.92) 11.15,22.17 11.26,22.06 11.26,19.32 11.05,19.1 v1(11.05,18.54)
VIN_REF: length 8.7
  TOP w0.4: U3.3 10.45,15.45 9.45,16.45 9.45,17.55 8.25,18.75 C3.1
  TOP w0.5: C3.1 7.55,19.27 R31.2 R27.1
/ENC_CS: length 21
  TOP w0.175: U4.39 42.5,29 v1(42.15,29.35) ; v1(40.4,39.2) 39.1,39.2 38.89,38.99 37.46,38.99 36.94,39.51 36.94,40.76 36.77,40.92 U5.9
  BOTTOM w0.175: v1(40.4,39.2) 43.64,35.96 43.64,32.4 42.15,30.92 v1(42.15,29.35)
/ENC_INT: length 30.8
  TOP w0.175: U5.4 40.02,41.77 v1(37.8,39.55) ; U4.20 46.8,20 46.39,19.59 v1(45.98,19.59)
  BOTTOM w0.175: v1(45.98,19.59) 45.31,19.59 44.65,20.25 43.5,20.25 40,23.75 40,30.2 38.54,31.66 38.54,34.76 37.8,35.5 v1(37.8,39.55)
/ENC_RESET: length 28
  TOP w0.175: v1(36.35,40.4) 36.35,41.3 36.12,41.52 U5.10 ; U4.54 v1(37.35,23.5)
  BOTTOM w0.175: v1(36.35,40.4) 36.35,37.05 32.77,33.47 32.75,33.47 32.15,32.87 32.15,29.15 31.04,28.04 31.04,26.85 31.48,26.41 31.98,26.41 34,24.39 34,24.2 34.7,23.5 v1(37.35,23.5)
/EXTERNAL_RESET: length 20.5
  TOP w0.175: R4.7 46.6,9.75 46.85,10 v1(46.95,10) 46.65,10.3 R4.8 ; J6.3 36.28,5.8 39.25,5.8 v1(41.8,8.35)
  BOTTOM w0.175: v1(41.8,8.35) 43.15,9.7 43.15,10.55 43.5,10.9 46.05,10.9 v1(46.95,10)
/MICRO_SD_CARD_INSERTED: length 46.2
  TOP w0.175: U4.57 37.05,22 37.31,21.74 38.51,21.74 v1(40.85,19.4) ; R7.8 v1(25.95,11.45) 25.25,11.45 22.15,14.55 15.2,14.55 12.7,17.05 J8.9
  BOTTOM w0.175: v1(40.85,19.4) 40.85,12.7 39.11,10.96 29.66,10.96 29.5,10.8 26.6,10.8 v1(25.95,11.45)
/MICROSD_CS: length 45.3
  TOP w0.175: v1(44.3,19.55) 44.3,21.36 45.94,23 U4.26 ; v1(20.7,16.25) 20.25,16.7 J8.2
  BOTTOM w0.175: v1(20.7,16.25) 20.7,13.65 26,8.35 40.15,8.35 42.75,10.95 42.75,18.55 43.75,19.55 v1(44.3,19.55)
/PWR_CTRL_ETHERNET: length 18.4
  TOP w0.175: R12.8 33.65,26.05 33,26.7 32.8,26.7 v1(32.7,26.8) 32.7,28.2 32.25,28.65 Q6.2 ; U4.4 v1(39.5,17.9)
  BOTTOM w0.175: v1(39.5,17.9) 39.5,21.3 38.1,22.7 38.1,23.75 37.79,24.06 36.29,24.06 34.8,25.55 33.95,25.55 v1(32.7,26.8)
/PWR_CTRL_HEADERS: length 7.4
  TOP w0.175: 56.75,19.5 56.75,17.75 57.7,16.8 Q3.6 ; 56.75,19.5 Q5.2 55.4,19.5 54.6,20.3 R11.8 ; 56.75,19.5 Q5.5
/PWR_CTRL_MICROSD: length 19
  TOP w0.175: R12.7 34.3,25.5 34.5,25.7 34.5,26.7 34.5,26.74 ; 34.5,26.74 34.5,26.75 34.4,26.85 34.4,28.35 34.1,28.65 Q6.5 ; 34.5,26.74 34.56,26.8 38,26.8 38.05,26.75 39.75,26.75 41.19,25.31 42.84,25.31 42.95,25.2 44.46,25.2 45.21,24.45 46.1,24.45 46.45,24.1 46.45,23.7 46.65,23.5 U4.27
/PWR_LED_OFF: length 7.7
  TOP w0.175: U4.2 38.5,15.55 38,15.05 35.8,15.05 35,14.25 35,13.46 34.45,12.91 R5.1
/RESET_MCU: length 47.2
  TOP w0.175: R4.5 45.95,8.3 v1(45.65,8) 43.9,8 42.2,9.7 42.2,13.8 41.3,14.7 41.3,15.4 41,15.7 U4.7 ; v1(55.45,9.5) C22.1 ; C22.1 54.45,8.65 53.3,7.5 v1(50.05,7.5) ; C22.1 54.45,9.95 54.25,10.15 Q2.6
  BOTTOM w0.175: J7.10 65.8,23.09 63,20.3 63,16.5 56,9.5 v1(55.45,9.5) ; v1(45.65,8) 46.15,7.5 v1(50.05,7.5)
A0: length 19.6
  TOP w0.175: U4.8 41.5,15.75 41.65,15.6 41.65,14.85 42.55,13.95 42.55,12.2 43.55,11.2 46.55,11.2 47.55,10.2 47.55,5.79 J5.1
A1: length 20.7
  TOP w0.175: J5.2 50.43,5.45 49.95,5.45 47.9,7.5 47.9,10.35 46.7,11.55 43.74,11.55 42.9,12.39 42.9,14.1 42,15 U4.9
A2: length 22.7
  TOP w0.175: U4.10 42.5,15 43.25,14.25 43.25,12.6 43.95,11.9 46.85,11.9 48.25,10.5 48.25,7.65 50.05,5.85 52.57,5.85 J5.3
A3: length 24.7
  TOP w0.175: J5.4 54.71,6.25 50.15,6.25 48.6,7.79 48.6,10.65 47,12.25 44.1,12.25 43.6,12.75 43.6,14.4 43,15 U4.11
A4: length 30.1
  TOP w0.175: J5.5 58.55,4.95 58.55,8.6 55,12.15 51.15,12.15 47.65,15.65 47.65,16.75 45.25,19.15 45.25,19.95 45.2,20 45.2,21.2 46.05,22.05 46.65,22.05 46.7,22 U4.24
A5: length 31.7
  TOP w0.175: v1(56.95,9.35) 54.5,11.8 51.01,11.8 47.3,15.51 47.3,16.55 44.9,18.95 44.9,19.8 44.85,19.85 44.85,21.35 46,22.5 U4.25
  BOTTOM w0.175: v1(56.95,9.35) 60.34,5.96 60.34,5.7 J5.6
CLOCK_OUT_25MHZ: length 2.8
  TOP w0.25: U4.41 R30.2
CLOCK_SIGNAL_25MHZ: length 5.7
  TOP w0.25: U5.23 38.73,34.27 41.3,31.7 R30.1
CT_T: length 7.1
  TOP w0.175: 27.52,39.98 28.82,39.98 C36.1 ; C36.1 L2.2 29.3,41.2 29.45,41.35 30,41.35 30.2,41.55 R20.2 ; C36.1 29.3,39.1 29.5,38.9 29.95,38.9 30.2,38.65 R21.2
CTRL_OF_PWR_HEADERS: length 12.2
  TOP w0.175: v1(50.95,21.05) 50.65,21.35 48.9,21.35 48.55,21.7 48.55,23.65 48.2,24 U4.28 ; v1(50.95,21.05) 50.95,19.45 51.7,18.7 R11.4 ; v1(50.95,21.05) 52.25,19.75 R11.2
D0: length 37.4
  TOP w0.175: U4.38 43,27.25 42.85,27.1 42.85,26.3 43.25,25.9 45.7,25.9 49.75,29.95 49.75,37.69 61.7,49.64 62.34,49.64 J2.1
D1: length 35
  TOP w0.175: J2.2 49.4,39.24 49.4,30.1 45.55,26.25 43.4,26.25 43.2,26.45 43.2,26.95 43.5,27.25 U4.37
D2: length 42.3
  TOP w0.175: v1(54.1,22.15) 54.1,29.05 53.15,30 53.15,40.45 57.01,44.31 57.26,44.31 v1(57.66,44.7) ; U4.17 47.5,18 v1(47.92,17.57)
  BOTTOM w0.175: v1(47.92,17.57) 48.95,16.55 50.05,16.55 54.1,20.6 v1(54.1,22.15) ; v1(57.66,44.7) 58.42,45.47 J2.3
D3: length 46.8
  TOP w0.175: v1(44.95,22.85) 43.65,21.55 43.65,19.4 44.46,18.59 44.71,18.59 45.5,17.8 U4.16
  BOTTOM w0.175: v1(44.95,22.85) 50.95,22.85 59.55,31.45 59.55,38.65 55.88,42.32 J2.4
D4: length 26
  TOP w0.175: J2.5 48.25,45.71 48.25,36.95 45.9,34.6 45.9,29.15 45.5,28.75 U4.33
D5: length 61.5
  TOP w0.175: J2.6 46.25,46.25 32,46.25 28.25,42.5 v1(26.78,42.5) ; U4.61 36.9,20 37.15,19.75 v1(37.15,19.3)
  BOTTOM w0.175: v1(26.78,42.5) 26.78,36.53 23.25,33 23.25,32.01 27.5,27.75 27.5,26.85 28.3,26.05 29,26.05 29.95,25.1 29.95,24.8 34.2,20.55 34.2,19.65 34.55,19.3 v1(37.15,19.3)
D6: length 56.7
  TOP w0.175: U4.62 35.2,19.5 v1(34.8,19.9) ; J2.7 47.15,49.69 47.15,48.65 45.1,46.6 31.15,46.6 v1(27.8,43.25)
  BOTTOM w0.175: v1(27.8,43.25) 27.8,37.05 23.65,32.9 23.65,32.1 24.45,31.3 26.05,31.3 28,29.35 28,28.3 27.85,28.15 27.85,27.05 28.5,26.4 29.15,26.4 30.3,25.25 30.3,24.95 34.8,20.45 v1(34.8,19.9)
D7: length 50.5
  TOP w0.175: U4.15 45,17.8 44.56,18.24 44.26,18.24 43.3,19.2 43.3,22.45 v1(43.75,22.9) ; J2.8 45.75,50.77 v1(45.75,48.05)
  BOTTOM w0.175: v1(45.75,48.05) 45.75,47.2 57.93,35.02 57.93,30.32 50.8,23.2 45.7,23.2 45.45,23.45 44.3,23.45 v1(43.75,22.9)
D8: length 57.5
  TOP w0.175: U4.14 44.5,17.5 v1(44.33,17.68) ; v1(60.25,34.95) v1(58.45,36.75)
  BOTTOM w0.175: v1(44.33,17.68) 46.16,15.85 52.31,15.85 53.8,17.34 53.8,18.55 55.01,19.76 55.01,26.31 60.25,31.55 v1(60.25,34.95) ; v1(58.45,36.75) 46.05,49.15 43.31,49.15 J4.1
D9: length 36.9
  TOP w0.175: U4.22 46.76,21 46.64,20.88 45.93,20.88 45.83,20.98 v1(45.79,20.98)
  BOTTOM w0.175: v1(45.79,20.98) 43.77,20.98 40.7,24.05 40.7,31 39.24,32.46 39.24,39.66 37.54,41.36 37.54,44.04 37.75,44.25 37.75,49.43 J4.2
D10: length 41.5
  TOP w0.175: v1(46.08,25.48) 46.08,24.98 46.55,24.5 U4.29 ; J4.3 38.03,49.35 42.15,49.35 v1(43.7,47.8)
  BOTTOM w0.175: v1(46.08,25.48) 47.35,26.75 47.35,27 51.9,31.55 53.4,31.55 54.35,32.5 54.35,36.05 43.7,46.7 v1(43.7,47.8)
D11: length 30.6
  TOP w0.175: v1(38.35,48.25) 36.59,48.25 J4.4 ; U4.36 44,26.9 43.95,26.85 v1(43.92,26.85)
  BOTTOM w0.175: v1(38.35,48.25) 38.85,48.25 43.99,43.11 43.99,28.24 43.92,28.17 v1(43.92,26.85)
D12: length 34.7
  TOP w0.175: v1(44.7,26.85) 44.7,26.9 44.5,27.1 U4.35 ; v1(41,47.9) 39.65,47.9 39.4,47.65 34.65,47.65 J4.5
  BOTTOM w0.175: v1(44.7,26.85) 44.7,26.85 44.7,28.75 44.4,29.05 44.4,44.05 41,47.45 v1(41,47.9)
D13: length 36.1
  TOP w0.175: J4.6 32.46,47.3 41.25,47.3 41.65,47.7 v1(42.35,47.7) ; U4.34 45,29.15 v1(45.3,29.45)
  BOTTOM w0.175: v1(45.3,29.45) 45.3,31.95 45,32.25 45,44.4 42.35,47.05 v1(42.35,47.7)
DCDC_FB: length 2.8
  TOP w0.6: R9.2 R10.1 27.7,20.05 27.25,20.5 U2.5
ENC_MISO: length 34.4
  TOP w0.175: v1(37.15,45.05) 38.2,45.05 38.73,44.52 U5.6 ; U4.56 36.9,22.5 37.05,22.35 v1(37.55,22.35)
  BOTTOM w0.175: v1(37.55,22.35) 35.35,22.35 33.65,24.05 33.65,24.25 31.83,26.06 31.33,26.06 30.69,26.71 30.69,28.19 31.55,29.05 31.55,33.07 32.4,33.92 32.42,33.92 35.55,37.05 35.55,40.95 37.15,42.55 v1(37.15,45.05)
ENC_MOSI: length 28
  TOP w0.175: v1(38.1,41.7) 38.08,41.73 38.08,43.35 ; v1(46.41,21.44) 46.47,21.5 U4.23
  BOTTOM w0.175: v1(38.1,41.7) 39.59,40.21 39.59,32.76 41.05,31.3 41.05,24.25 43.45,21.85 46,21.85 v1(46.41,21.44)
ENC_SCK: length 29.6
  TOP w0.175: U5.8 37.42,41.27 37.5,41.2 v1(37.5,40.4) ; U4.21 46.5,20.5 46.32,20.32 v1(46.26,20.32)
  BOTTOM w0.175: v1(37.5,40.4) 37.79,40.11 38.14,40.11 38.89,39.36 38.89,32.01 40.35,30.55 40.35,23.9 43.65,20.6 44.8,20.6 45.08,20.32 v1(46.26,20.32)
JTCK: length 38.1
  TOP w0.175: U4.49 38.8,26 40.75,24.05 42.5,24.05 v1(42.85,24.4) ; J7.4 66.62,29.38 66.62,30.17 65.54,31.25 61.7,31.25 60.15,32.8 v1(53.75,32.8)
  BOTTOM w0.175: v1(53.75,32.8) 52.2,32.8 43.8,24.4 v1(42.85,24.4)
JTDI: length 42.2
  TOP w0.175: U4.50 36.9,25.5 36.95,25.55 38.75,25.55 40.6,23.7 43.15,23.7 43.56,24.11 v1(44.76,24.11) ; v1(55.3,29.95) 55.3,30 56.05,30.75 60.15,30.75 62.95,27.95 62.95,24.75 64.2,23.5 65.88,23.5 66.65,24.27 66.65,25.16 J7.8
  BOTTOM w0.175: v1(44.76,24.11) 45.1,24.45 46.75,24.45 48.5,26.2 48.5,27.1 51.35,29.95 v1(55.3,29.95)
JTDO: length 42.2
  TOP w0.175: J7.6 67,26.09 67,23.95 66.08,23.03 63.72,23.03 59.55,27.2 57.64,27.2 56.15,28.69 v1(56.15,30.05) ; v1(45.86,23.85) 45.51,23.5 43.45,23.5 42.89,22.94 37.12,22.94 37.05,23 U4.55
  BOTTOM w0.175: v1(45.86,23.85) 47.95,23.85 52.3,28.2 54.8,28.2 56.15,29.55 v1(56.15,30.05)
JTMS: length 32.3
  TOP w0.175: J7.2 64.9,30.73 61.38,30.73 60.8,31.3 55.73,31.3 v1(55.27,30.83) ; U4.46 39,27.25 39.15,27.1 39.95,27.1 41.39,25.66 42.99,25.66 43.1,25.55 44.93,25.55 v1(45.44,25.04)
  BOTTOM w0.175: v1(55.27,30.83) 51.73,30.83 48.15,27.25 48.15,26.35 46.7,24.9 45.75,24.9 45.61,25.04 v1(45.44,25.04)
LED: length 28
  TOP w0.175: v1(51.55,19.65) 51.95,19.25 R11.3 ; U4.43 40.5,27.05 40.75,26.8 41.3,26.8 41.88,26.23 v1(42.08,26.23) ; R12.6 34.3,25 34.85,25.55 34.85,26.1 35.2,26.45 37.85,26.45 37.9,26.4 39.6,26.4 41.26,24.75 v1(42.05,24.75)
  BOTTOM w0.175: v1(42.08,26.23) 42.05,26.23 v1(42.05,24.75) 42.05,23.75 43.6,22.2 49,22.2 v1(51.55,19.65)
LEDB: length 48.4
  TOP w0.175: D7.A 3.85,50.3 R15.1 4.3,51.1 v1(4.92,51.72) ; U5.26 40.67,37.92 40,38.6 35.9,38.6 v1(34.1,40.4)
  BOTTOM w0.175: v1(4.92,51.72) 5.48,51.72 5.6,51.6 8.45,51.6 13.05,47 31.25,47 34.1,44.15 v1(34.1,40.4)
OSC_IN: length 8.8
  TOP w0.175: Y1.2 36.55,12.4 C23.1
  TOP w0.191: Y1.2 37.7,12.45 38.55,13.3 38.55,14.75 39.4,15.6 39.75,15.6 40,15.85 U4.5
OSC_OUT: length 1.6
  TOP w0.191: U4.6 40.5,15.15 R13.2
OTG_FS_DM: length 1.4
  TOP w0.25: R14.4 40.08,28.84 40,28.76 U4.44
OTG_FS_DP: length 1.4
  TOP w0.25: R14.3 39.42,28.77 39.5,28.7 U4.45
RBIAS: length 2.1
  TOP w0.4: U5.14 33.52,44.73 R17.1
RD+: length 12.4
  TOP w0.175: U5.13 34.17,41.88 30.85,38.55 30.85,36.7 29.6,35.45 R18.1 27.62,35 27.52,34.9
RD-: length 17.1
  TOP w0.175: U5.12 34.83,42.03 31.2,38.41 31.2,32.1 30.95,31.85 29.8,31.85 29.6,32.05 R19.1 27.66,32.5 T1.9
RX+: length 11.4
  TOP w0.175: J9.3 15.69,41.41 16.45,40.65 16.45,38.25 17.65,37.05 17.65,35.2 17.95,34.9 18.98,34.9
RX-: length 7.4
  TOP w0.175: T1.8 17.95,32.35 17.25,33.05 17.25,35.62 J9.6
SCL: length 43.1
  TOP w0.175: v1(37.85,21.15) 37.35,21.15 37,21.5 U4.58 ; J4.10 18.8,50.8 21.6,48 22.2,48 23.95,46.25 23.95,32.7 v1(24.25,32.4)
  BOTTOM w0.175: v1(24.25,32.4) 24.95,31.7 26.25,31.7 28.35,29.6 28.35,28.15 28.2,28 28.2,27.2 28.65,26.75 29.3,26.75 30.65,25.4 30.65,25.1 34.5,21.25 37.75,21.25 v1(37.85,21.15)
SDA: length 42.9
  TOP w0.175: U4.59 37,21 37.39,20.61 37.58,20.61 37.64,20.55 38.5,20.55 v1(38.55,20.6) ; J4.9 24.6,47.54 24.6,32.9 v1(25.05,32.45)
  BOTTOM w0.175: v1(38.55,20.6) 38.55,21.35 38.15,21.75 37.45,21.75 37.3,21.6 34.65,21.6 31,25.25 31,25.55 29.7,26.85 29.7,28.75 26,32.45 v1(25.05,32.45)
SPI3_MISO: length 53.7
  TOP w0.175: U4.52 36.8,24.5 36.9,24.6 37.35,24.6 v1(37.35,24.62) ; v1(31.2,9.75) 31.2,10.41 31.55,10.76 R26.1 ; v1(15.75,16.05) 14.75,17.05 J8.7
  BOTTOM w0.175: v1(15.75,16.05) 17.35,17.65 21.1,17.65 22.15,16.6 22.15,13.75 26.15,9.75 v1(31.2,9.75) 34.7,9.75 35.01,9.44 39.74,9.44 41.55,11.25 41.55,19.75 38.45,22.85 38.45,23.95 37.77,24.62 v1(37.35,24.62)
SPI3_MOSI: length 48.5
  TOP w0.175: v1(19.8,16.2) 19.15,16.85 J8.3 ; U4.53 37.05,24 37.12,24.06 37.74,24.06 38.2,23.6 v1(39.4,23.6)
  BOTTOM w0.175: v1(19.8,16.2) 19.8,16.25 20.36,16.81 20.93,16.81 21.45,16.3 21.45,13.45 26.2,8.7 40,8.7 42.4,11.1 42.4,19.9 39.4,22.9 v1(39.4,23.6)
SPI3_SCK: length 50.9
  TOP w0.175: v1(38.6,24.9) 38.3,25.2 37.13,25.2 36.93,25 U4.51 ; J8.5 v1(16.95,16.35)
  BOTTOM w0.175: v1(16.95,16.35) 18.25,16.35 19.06,17.16 21.08,17.16 21.8,16.44 21.8,13.6 26.35,9.05 39.85,9.05 41.9,11.1 41.9,19.9 38.8,23 38.8,24.2 38.6,24.4 v1(38.6,24.9)
SWITCH1: length 49.3
  TOP w0.175: U4.3 39,17.5 38.85,17.65 38.85,18.65 ; 38.85,18.65 37,20.5 U4.60 35.05,20.5 34.9,20.65 34.9,23.45 34.46,23.89 32.81,23.89 32.55,24.15 32.55,24.43 R12.4 ; 38.85,18.65 41.05,18.65 41.4,18.3 v1(43.35,18.3) ; v1(53.3,24.35) 53.3,28.07 52.76,28.61 SW1.4 48.91,28.61 46.64,26.34 46.64,25.24 46.88,25 U4.30
  BOTTOM w0.175: v1(43.35,18.3) 44.5,18.3 46.6,16.2 50.2,16.2 54.66,20.66 54.66,22.99 v1(53.3,24.35)
TD+: length 12.2
  TOP w0.175: T1.16 28.55,41.24 R20.1 29.3,42.5 29.45,42.65 30.65,42.65 32.25,41.05 v1(32.25,41) ; v1(33.45,39.8) 34.83,38.42 U5.17
  BOTTOM w0.175: v1(33.45,39.8) v1(32.25,41)
TD-: length 10
  TOP w0.175: U5.16 34.17,37.73 v1(33.1,38.8) ; T1.14 28.84,38.7 R21.1 29.3,37.8 29.65,37.45 v1(30.25,37.45)
  BOTTOM w0.175: v1(30.25,37.45) 30.9,37.45 32.25,38.8 v1(33.1,38.8)
TX+: length 7.8
  TOP w0.175: J9.1 15.85,43.95 16.5,43.3 16.5,42.6 17.86,41.24 T1.1
TX-: length 6.1
  TOP w0.175: J9.2 17.65,40.3 17.65,39 17.95,38.7 T1.3
USB5V: length 10.8
  TOP w0.4: 5.45,26.8 5.45,27.35 4.2,28.6 2.45,28.6 1.8,29.25 F1.1 ; 5.45,26.8 D4.1 ; 5.45,26.8 5.45,24.65 4.92,24.12 J3.1
USB5V_F: length 45.2
  TOP w0.175: U4.42 41,29.45 40.7,29.75 40.7,31.55 39.12,33.12 33.27,33.12 31.55,31.4 13.7,31.4 13.4,31.7 v1(11.3,31.7)
  TOP w0.5: v2(10,28.75) Q4.3 ; F1.2 v2(6.55,30.4)
  BOTTOM w0.175: v1(11.3,31.7) 10,30.4 v2(10,28.75)
  BOTTOM w0.5: v2(10,28.75) 8.2,28.75 v2(6.55,30.4)
USB_D+: length 44.2
  TOP w0.191: J3.3 4.97,22.82 5.1,22.95 6.25,22.95 D6.1 6.75,22.95 7.71,22.95 8.32,23.56 8.32,28.51 10.29,30.48 10.67,30.48 10.86,30.29 10.86,30.1 11.05,29.91 11.24,29.91 11.43,30.1 11.43,30.29 11.62,30.48 31.93,30.48 33.64,32.19 38.86,32.19 39.42,31.63 R14.2
USB_D-: length 44.3
  TOP w0.191: J3.2 4.93,23.47 5.05,23.35 6.25,23.35 D5.1 6.75,23.35 7.54,23.35 7.94,23.75 7.94,28.7 10.1,30.86 31.76,30.86 33.48,32.58 39.05,32.58 40.08,31.55 R14.1
VCAP_1: length 4.5
  TOP w0.3: C19.1 49.35,22.85 49.35,24.45 48.3,25.5 U4.31
VCAP_2: length 3.2
  TOP w0.3: U4.47 38.5,29.35 37.25,30.6 C18.1
N62753: length 5.7
  TOP w0.175: v1(49.3,8.1) Q2.3 Q2.2 ; v1(46.95,8.1) 46.95,8.9 46.6,9.25 R4.6
  BOTTOM w0.175: v1(49.3,8.1) v1(46.95,8.1)
N62801: length 2.2
  TOP w0.3: R6.1 58,41.45 D3.C
N63121: length 7.1
  TOP w0.175: Y1.1 40.95,12.4 C24.1
  TOP w0.191: Y1.1 39.8,12.45 38.95,13.3 38.95,14.6 39.3,14.95 R13.1
N63233: length 1.8
  TOP w0.9: R3.2 C2.2
N74908: length 46.5
  TOP w0.175: R6.2 57.45,43.3 56.65,42.5 56.65,37.55 62.6,31.6 65.95,31.6 67.45,30.1 67.45,23.5 65.9,21.95 60.75,21.95 59.2,20.4 59.2,14.65 58.75,14.2 56.1,14.2 55.8,14.5 Q3.3
N236614: length 28.3
  TOP w0.175: Q1.2 31.97,13.22 31.49,12.74 29.71,12.74 28.8,13.65 25.5,13.65 v1(22.85,16.3)
  TOP w0.5: v1(12.36,21.16) 12.02,21.5 R2.2 10.69,21.99 10.69,22.2 9.78,23.11 D2.A
  BOTTOM w0.175: v1(12.36,21.16) 12.93,21.16 13,21.09 14.37,21.09 17.45,18 21.75,18 22.85,16.9 v1(22.85,16.3)
N237577: length 3.6
  TOP w0.175: Q1.1 31.97,14.6 32.55,14.6 32.8,14.35 32.8,11.8 R5.2
N238352: length 14.8
  TOP w0.175: R11.6 54.6,19.25 54.74,19.11 54.74,17.94 53.8,17 53.8,15.85 55.9,13.75 59,13.75 59.85,14.6 v1(59.85,15.35) ; v1(58.6,15.95) 58.4,15.75 Q3.5
  BOTTOM w0.175: v1(58.6,15.95) 59.25,15.95 v1(59.85,15.35)
N238638: length 8.9
  TOP w0.175: Q2.5 v1(50.25,9.5) ; v1(43.75,10.3) R4.1
  BOTTOM w0.175: v1(43.75,10.3) 44.65,9.4 47.2,9.4 47.3,9.5 v1(50.25,9.5)
N251644: length 6.4
  TOP w0.175: R11.7 54.65,19.75 55.09,19.31 55.09,17.79 54.24,16.94 54.24,16.17 54.65,15.75 Q3.2
N353564: length 8.9
  TOP w0.175: R7.6 26.25,12.5 26.2,12.45 25.35,12.45 21.35,16.45 J8.1
N353572: length 16.4
  TOP w0.175: R7.7 26.25,12 26.2,12.05 25.2,12.05 22.25,15 15.75,15 13.65,17.1 J8.8
N356854: length 2.4
  TOP w0.45: U5.1 42.08,43.45 43.95,43.45 C34.1
N357540: length 2.5
  TOP w0.175: R19.2 30.5,33.65 C35.1 30.5,33.75 R18.2
N357870: length 17.7
  TOP w0.175: 18.98,39.98 19.98,39.98 20.5,40.5 20.5,41.75 19.25,43 17.75,43 16.2,44.55 15.65,44.55 11.2,49 11.2,50.25 10.7,50.75 R23.1
N357878: length 27.8
  TOP w0.175: T1.7 20.38,33.62 20.85,34.1 20.85,41.9 19.4,43.35 17.9,43.35 16.35,44.9 15.8,44.9 11.55,49.15 11.55,50.55 10.65,51.45 8.65,51.45 R22.1
N357886: length 18.4
  TOP w0.175: R24.1 8.3,49.6 8.55,49.6 8.9,49.95 10.5,49.95 10.85,49.6 10.85,48.65 11.5,48 11.5,39.25 11.88,38.87 J9.5 14,38.87 J9.4
N357906: length 17.7
  TOP w0.175: R25.1 10.2,48.6 11,47.8 11,37 11.67,36.33 J9.7 14,36.33 J9.8
N357926: length 22.3
  TOP w0.25: 7.05,50 R24.2 v1(7.05,48.4) 7.65,48.4 7.85,48.6 8.65,48.6 R25.2 ; 7.05,50 8.4,50 9.1,50.7 9.25,50.7 R23.2 ; 7.05,50 R22.2
  TOP w0.5: v1(18.3,44.85) 18.65,45.2 C37.1
  BOTTOM w0.5: v1(7.05,48.4) 7.59,48.94 10.06,48.94 14.15,44.85 v1(18.3,44.85)
N358056: length 4.1
  TOP w0.175: R15.2 5.9,50.7 5.26,50.06 5.06,50.06 4.87,49.87 4.87,49.82 R16.1 3.75,48.7 D7.C
N1930270: length 3.1
  TOP w0.6: U2.3 32.51,22.95 L1.1

## Copper pours and planes (outline as drawn; the poured copper is in the pictures)
+3.3V on TOP: 31,21.25 31,20 30.75,19.75 29.5,19.75 29.5,19.25 30.25,19.25 30.25,18.25 30,18.25 30,14.25 30.75,14.25 30.75,15.25 33,15.25 33,19.75 34.25,19.75 34.25,21.25
+3.3V on L3-PWR: 65,16 65,30.5 58,30.5 58,33.25 46.5,33.25 46.5,33 34.75,33 34.75,29.25 32.75,29.25 32.75,29.75 30,29.75 30,28 32.5,28 32.5,26.25 31.25,26.25 31.25,25 31.5,25 31.5,15.25 29.75,15.25 29.75,11.75 28.25,11.75 28.25,8.75 44.5,8.75 44.5,9.75 50.75,16 50.75,20.5 51.75,21.5 52.75,21.5 55.5,18.75 58.25,18.75 59,18 59,16
+3V3_ETHERNET on L3-PWR: 34.5,33.25 34.5,29.5 33,29.5 33,30 30.5,30 30.5,41.25 46.25,41.25 46.25,33.25
+3V3_MICROSD on L3-PWR: 32.25,27.75 32.25,26.5 31,26.5 31,24.75 31.25,24.75 31.25,15.5 29.5,15.5 29.5,12 28.25,12 28.25,12.25 17.5,12.25 17.5,17.75 27,17.75 29,19.75 29,27.75
+5.0V on TOP: 26.15,19.25 26.15,29.5 20.65,29.5 20.65,27 18.15,27 18.15,19.75 18.65,19.25
+5.0V on TOP: 27.75,22.7 27.75,25.15 26.7,25.15 26.7,22.7
+5.0V on BOTTOM: 0.5,51.5 0.5,43.25 8.75,43.25 9.81,42.81 10.25,41.75 10.25,37.25 9.81,36.19 8.75,35.75 0.5,35.75 0.5,0.5 35.25,0.5 35.25,8.75 26.5,8.75 26.25,9 26.25,10.75 39.25,10.75 40.75,12.25 40.75,22 34.25,22 30.75,25.5 29.75,25.5 25.25,30 25.25,31.25 31.75,31.25 31.75,33 34,35.25 34,44.25 31.25,47 13.25,47 8.75,51.5
+5.0V on L2-GND: 17.75,29.5 25.75,29.5 25.75,19.25 17.75,19.25
+5.0V on L3-PWR: 0.5,52.75 0.5,43.25 8.75,43.25 9.81,42.81 10.25,41.75 10.25,37.25 9.81,36.19 8.75,35.75 0.5,35.75 0.5,0.5 65.5,0.5 65.5,2.75 68,5.25 68,37.5 65.5,40 65.5,51.5 64.25,52.75
GND on TOP: 27.05,19.75 26.55,19.75 26.55,19.05 25.65,18.15 25.65,14.1 27.9,14.1 27.9,18.4 27.3,18.4 27.05,18.65
GND on L2-GND: 0.5,52.75 0.5,43.25 8.75,43.25 9.81,42.81 10.25,41.75 10.25,37.25 9.81,36.19 8.75,35.75 0.5,35.75 0.5,0.5 65.5,0.5 65.5,2.75 68,5.25 68,37.5 65.5,40 65.5,51.5 64.25,52.75

## Text on the board
Ref Des/Silkscreen Top: 7.5-9.0V | ACT | MicroSD | TM | REV.A | Power | Digital I/O | Analog In | BTN | LED | PWR | SC | SD | GND | 13 | IOREF | 12 | /RESET | 11 | 3V3 | 10 | 5V | 9 | 8 | 7 | VIN | 6 | 5 | 0 | 4 | 1 | 3 | 2 | www.netduino.com
NCLEGEND-1-4: FIGURE | SIZE | 0.25 | 0.5 | 0.65 | 0.8 | 0.89 | 1.57 | 1.8 | 3.25 | 2.4 | 3.2 | 1.0x0.75 | 1.3x0.75 | DRILL CHART: TOP to BOTTOM | ALL UNITS ARE IN MILLIMETERS | TOLERANCE | +0.08/-0.08 | +0.05/-0.0 | +0.1/-0.0 | PLATED | NON-PLATED | QTY | 181 | 50 | 10 | 32 | 8 | 2 | 3 | 1
